# Altium PCB car_template 2021V3.PcbDoc (part 2 of 2)
Units mm, origin at the board's own origin, x right, y up, seen from the top; angles counter-clockwise.
Board outline 64 x 85 mm, 4 copper layers (Top Side, Ground Plane, Power Plane, Bottom Side), stack 0.844 mm thick; 89 components, 78 nets, 327 pads, 91 vias.
Unrouted connection lines stored in the file: 10.
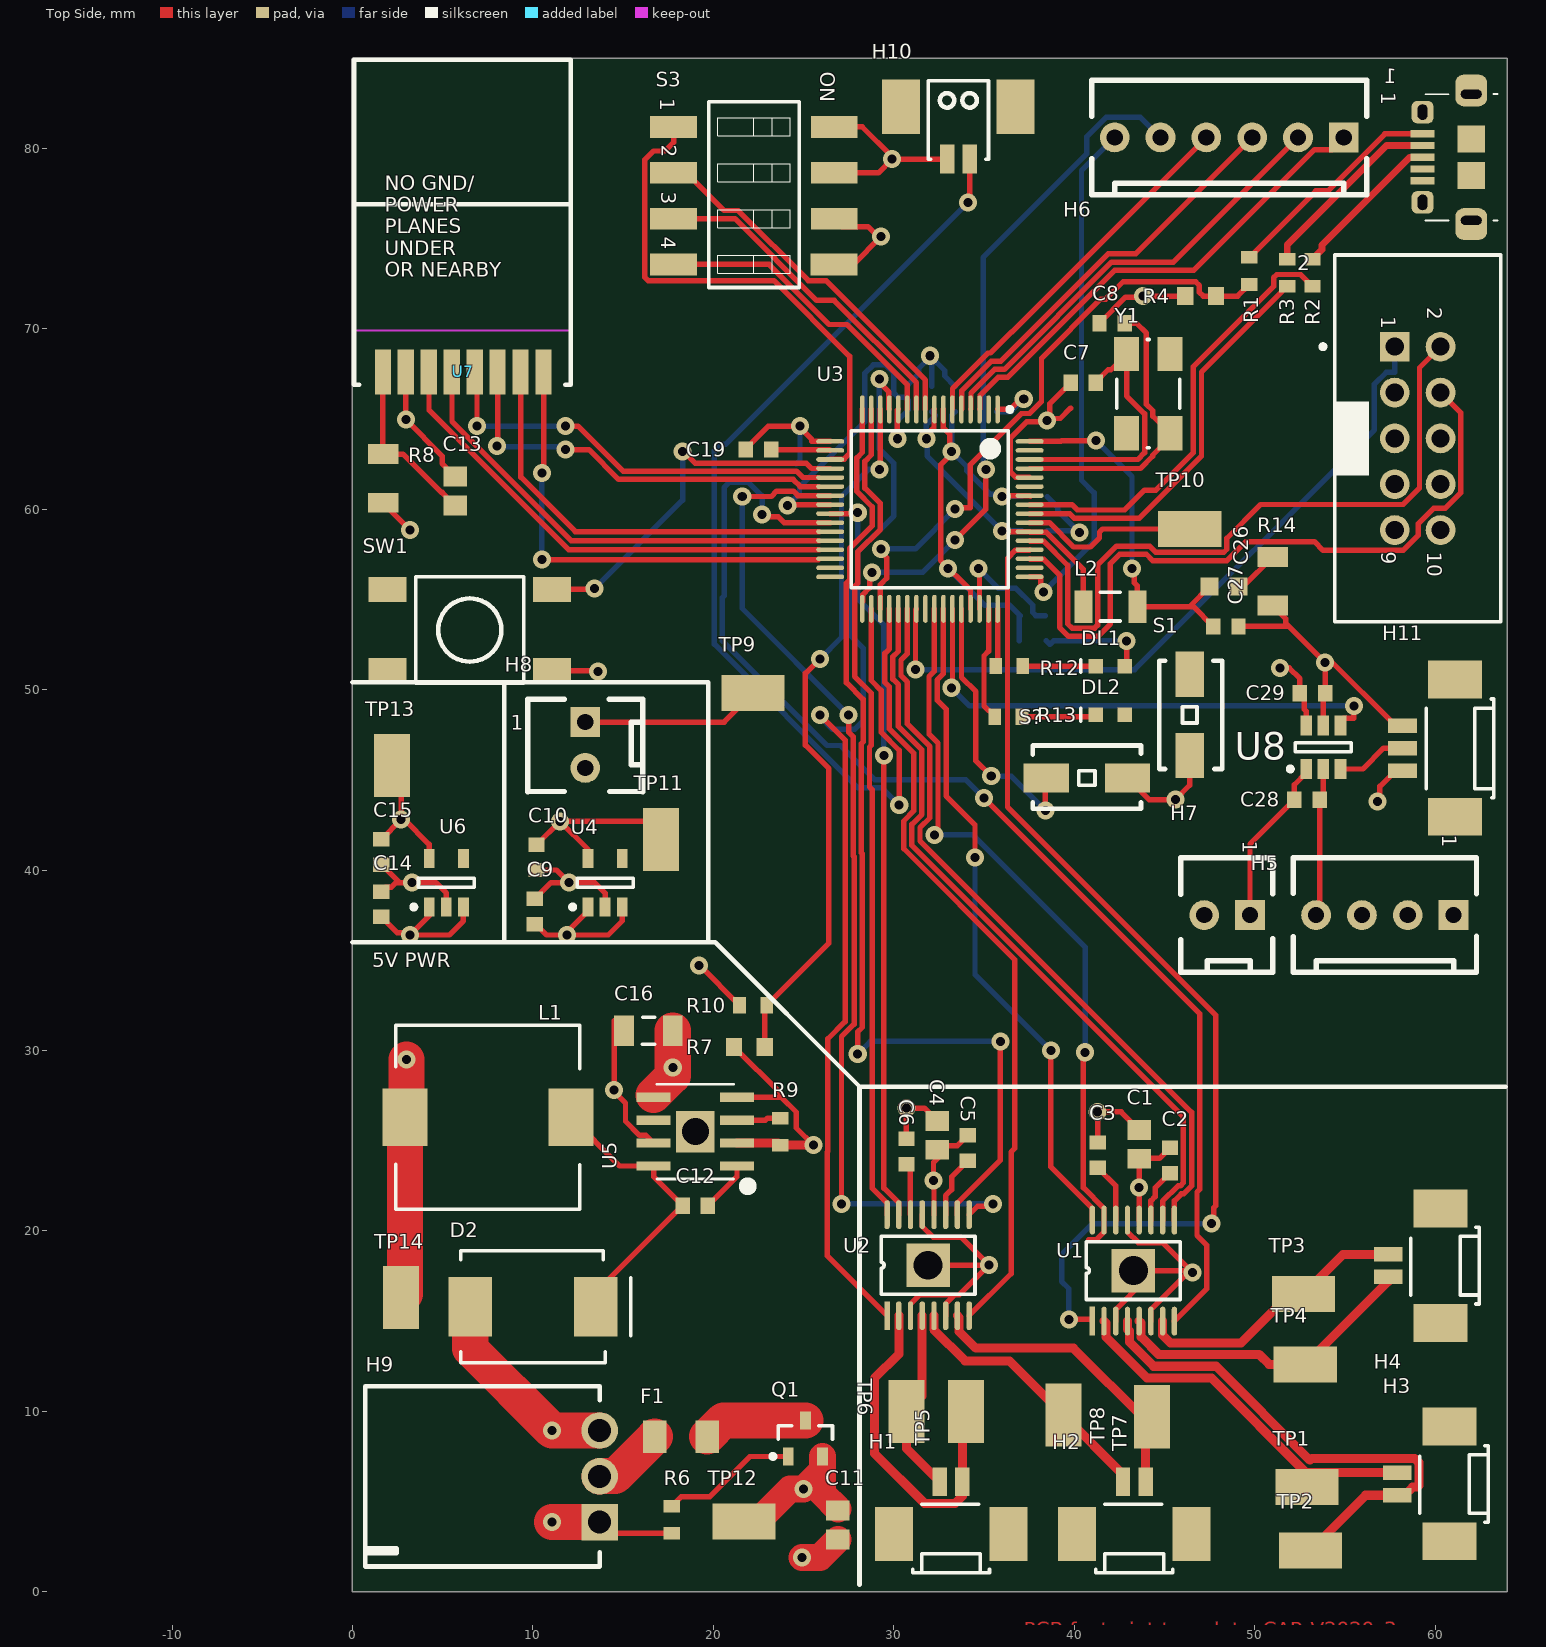
[diagram p0: Top Side view]

## Via types
v1: diameter 1, hole 0.5, Top Side to Bottom Side, 57 vias
v2: diameter 1, hole 0.5, Top Side to Bottom Side, tented both sides, 31 vias
v3: diameter 2.2, hole 1.6, Top Side to Bottom Side, 2 vias
v4: diameter 2, hole 1.5, Top Side to Bottom Side, 1 vias

## Nets (pads, with @x,y where several pads share a name; then routed paths per layer and width w, separated by ;. In a path a pad name is that pad's centre, name@x,y a point inside that pad or via, vN(x,y) a via of type N, cw(c..) or ccw(c..) an arc to the next point about the centre after c; other vN are vias at no path point) (continued)
SPI_MOSI: U3.22 U7.6 | length 22.1
  Top Side w0.3: v2@8.057,63.557 U7.6@8.057,67.2 ; v2(11.8,63.3) 13.1,63.3 14.75,61.65 24.418,61.65 24.818,61.25 U3.22@25.85,61.25
  Bottom Side w0.3: v2@8.05,63.45 v2@11.65,63.45
  other v2: 8,63.5
SPI_SPCK: U3.21 U7.5 | length 22.6
  Top Side w0.3: v2(6.9,64.6) U7.5@6.9,67.086 ; v2(11.8,64.6) 12.5,64.6 15,62.1 24.604,62.1 24.954,61.75 U3.21@25.85,61.75
  Bottom Side w0.3: v2(6.9,64.6) v2(11.8,64.6)
STATUS0: R12.2 U3.48 | length 3.2
  Top Side w0.3: R12.2 35.75,51.4 U3.48
STATUS1: R13.2 U3.47 | length 6.3
  Top Side w0.3: U3.47 35.25,52.124 35,51.874 35,49.1 R13.2
SWCLK: 2.2 U3.53 | length 39.7
  Top Side w0.3: U3.53 37.55,58.225 38.301,58.225 39.638,56.888 39.638,53.637 39.876,53.4 41.124,53.4 41.3,53.576 41.3,56.911 42.339,57.95 44.176,57.95 44.526,57.6 48.274,57.6 48.45,57.776 48.45,58.381 50.324,60.255 58.226,60.255 59.134,61.163 59.134,67.834 2.2
SWDIO: 2.4 U3.51 | length 39.7
  Top Side w0.3: U3.51 37.55,57.225 38.301,57.225 39.188,56.338 39.188,53.451 39.689,52.95 41.311,52.95 42,53.639 42,56.974 42.526,57.5 43.989,57.5 44.339,57.15 48.461,57.15 49.511,58.2 53.308,58.2 53.793,57.715 58.226,57.715 59.066,58.555 59.066,59.197 59.907,60.037 60.548,60.037 61.425,60.914 61.425,65.335 2.4
USB_DETECT: R1.1 R4.2 U3.35 | length 33.8
  Top Side w0.3: U3.35 29.25,55.819 29.6,56.169 29.6,57.311 29.3,57.611 v1(29.3,57.8) ; v1(33.4,60) 33.476,60.076 34.242,60.076 34.242,62.473 37.069,65.3 37.531,65.3 38.184,65.953 38.184,68.358 41.463,71.637 41.737,71.637 42.7,72.6 46.724,72.6 46.937,72.387 46.937,72.013 47.15,71.8 R4.2 49.05,71.8 R1.1
  Bottom Side w0.3: v1(29.3,57.8) 31.2,57.8 v1(33.4,60)
V_BATT: F1.2 H9.2 | length 4
  Top Side w2: H9.2 13.706,6.406 14.556,6.406 F1.2
V_BATT_FUSED: C1.2 C2.2 C4.2 C5.2 C11.2 Q1.2 R7.1 R9.2 TP12.1 U1.12 U2.12 U5.2 U5.4 | length 33.9
  Top Side w0.3: R7.1 23.769,27.581 23.769,27.405 ; U5.4 23.769,27.405 ; R9.2@23.585,24.865 R9.2 ; v2(25.55,24.75) 24.593,25.707 24.593,26.582 23.769,27.405 ; U2.12 32.225,22.775 v2(32.2,22.8) 32.2,23.8 C4.2@32.8,24.4 ; C4.2 32.623,24.723 33.523,24.723 C5.2 ; U1.12 v2(43.6,22.4) C1.2 43.623,24.023 44.723,24.023 C2.2
  Top Side w0.5: U5.2 R9.2@23.585,24.865 ; R9.2 v2(25.55,24.75)
  Top Side w1.5: TP12.1 22.45,3.9 24.25,5.7 v2(25,5.7) 26.05,6.75 ; Q1.2 26.05,6.75 ; C11.2@26.9,4.6 26.05,5.45 26.05,6.75
VBUS: 1.1 R1.2 | length 12.4
  Top Side w0.3: R1.2 53.388,77.638 54.054,77.638 57.215,80.8 1.1
pads on no net: 1.4 2.3 2.9 2.10 H1.M H2.M H3.M H4.M H10.M H11.M SW1.1 SW1.3 U3.31 U3.32 U3.40 U3.50 U3.59 U3.63 U4.4 U5.6 U6.4 Y1.2 Y1.4

## Polygon pours and split planes (outlines as drawn)
GND on Ground Plane (split plane): 63.49,0.694 63.306,0.51 1.473,0.51 0.51,1.473 0.51,69.6 14.541,69.6 15.8,70.859 15.8,84.49 63.49,84.49
GND on Ground Plane (split plane): 1.106,0.51 0.51,0.51 0.51,1.106
5V on Power Plane (split plane): 63.49,53.363 63.48,53.35 63.471,53.3 63.471,28.829 19.5,28.829 19.45,28.82 19.408,28.792 17.508,26.892 17.48,26.85 17.471,26.8 17.48,26.75 17.508,26.708 20.008,24.208 20.05,24.18 20.1,24.171 22.746,24.171 25.571,21.346 25.571,12.829 0.51,12.829 0.51,39.271 17.7,39.271 17.75,39.28 17.792,39.308 21.254,42.771 29.471,42.771 29.48,42.721 29.508,42.679 29.55,42.651 29.6,42.641 29.65,42.651 29.692,42.679 29.883,42.871 44,42.871 44.05,42.88 44.092,42.908 47.932,46.749 55.4,46.749 55.439,46.754 55.476,46.769 55.507,46.793 56.407,47.693 56.431,47.724 56.446,47.761 56.451,47.8 56.451,53.471 63.49,53.471
3V3 on Power Plane (split plane): 63.49,53.729 56.378,53.729 56.376,53.731 56.339,53.746 56.3,53.751 56.261,53.746 56.224,53.731 56.193,53.707 56.169,53.676 56.154,53.639 56.149,53.6 56.149,47.863 55.337,47.051 47.9,47.051 47.861,47.046 47.824,47.031 47.793,47.007 47.769,46.976 47.754,46.939 47.754,46.937 43.946,43.129 29.829,43.129 29.78,43.12 29.738,43.092 29.659,43.013 29.65,43.02 29.6,43.029 21.2,43.029 21.15,43.02 21.108,42.992 17.646,39.529 5.129,39.529 5.129,39.7 5.129,40.3 5.129,59.371 13.4,59.371 13.45,59.38 13.492,59.408 30.654,76.571 36.6,76.571 36.65,76.58 36.692,76.608 44.573,84.49 63.49,84.49
V_BATT_FUSED on Power Plane (split plane): 63.49,0.64 63.44,0.63 63.398,0.602 63.37,0.56 63.36,0.51 28.273,0.51 28.181,0.602 28.139,0.63 28.09,0.64 15.529,0.64 15.529,4.346 17.054,5.871 23.2,5.871 23.25,5.88 23.292,5.908 25.792,8.408 25.82,8.45 25.829,8.5 25.829,21.4 25.82,21.45 25.792,21.492 22.892,24.392 22.85,24.42 22.8,24.429 20.154,24.429 17.783,26.8 19.554,28.571 63.49,28.571
no net on Power Plane (split plane): 36.546,76.829 30.6,76.829 30.55,76.82 30.508,76.792 13.346,59.629 5.129,59.629 5.129,60.6 5.12,60.65 5.092,60.692 4.592,61.192 4.55,61.22 4.5,61.229 0.51,61.229 0.51,84.49 44.206,84.49
3V3_RADIO on Power Plane (split plane): 4.871,60.546 4.871,40.3 4.871,39.7 4.871,39.529 0.51,39.529 0.51,60.971 4.446,60.971
no net on Power Plane (split plane): 25.571,8.554 23.146,6.129 17,6.129 16.95,6.12 16.908,6.092 15.308,4.492 15.28,4.45 15.271,4.4 15.271,0.51 0.51,0.51 0.51,12.571 25.571,12.571

## Other copper
Top Side:
  text "PCB footprint template_CAR V2020_3" at 37.2,-2.5 h0.8
Ground Plane (plane layer: these items are gaps in the copper):
  pour cut-out: -15.2,62.4
  pour cut-out: 0.2,84.8 0.071,84.671 0.071,69.6 14.541,69.6 15.8,70.859 15.8,85.036
  lines w0.254: 0,85 64,85 64,1.021 62.979,0 ; 0.2,1.6 0.2,84.8 63.9,84.8 63.9,0 1.8,0 0.2,1.6
Power Plane (plane layer: these items are gaps in the copper):
  lines w0.254: 0,0 64,0 ; 0,12.7 25.6,12.7 ; 0,39.6 0.2,39.4 5,39.4 ; 0,61.1 4.5,61.1 5,60.6 5,40.3 5,39.4 ; 0,85 64,85 64,0 ; 5,39.7 5,39.4 ; 5,59.5 13.4,59.5 30.6,76.7 30.9,76.7 36.6,76.7 45,85.1 ; 15.4,0 15.4,4.4 17,6 23.2,6 25.7,8.5 25.7,21.4 22.8,24.3 20.1,24.3 17.6,26.8 19.5,28.7 19.683,28.7 ; 15.529,0.51 28.09,0.51 28.4,0.2 ; 23.1,28.7 19.683,28.7 ; 29.6,42.771 29.829,43 30.159,43 44,43 47.9,46.9 ; 29.6,42.9 21.2,42.9 17.7,39.4 17.4,39.4 5,39.4 ; 44.4,28.7 45.825,28.7 63.6,28.7 63.6,53.3 63.9,53.6 56.3,53.6 ; 44.5,28.7 26.5,28.7 19.683,28.7 ; 58.8,28 59.1,28 ; 63.49,0.51 64,0 ; 64,23.1 64,0 ; 48,80 48,80
  lines w0.3: 47.9,46.9 55.4,46.9 56.3,47.8 56.3,53.6

## Silkscreen, mask and mechanical layers (free items; w line width, h text height)
Top Overlay:
  lines w0.254: 0,36 20.1,36 28.1,28 28.1,2.7 28.1,0.4 ; 0,50.4 19.706,50.4 19.706,36 ; 8.4,36.1 8.4,50.3 ; 28.2,28 38,28 63.9,28
  text "5V PWR" at 1.1,34.6 h0.8
Board Outline:
  the board outline again, w0.254

## Dimensions
0,86 to 64,86 on Mechanical 1
65,85 to 65,0 on Mechanical 1

## Text inside footprints (layer, text, board x,y; h text height)
1: Mechanical 1 "PCB Edge" at 64.27,81.65 h0.8 r90
2: Top Overlay "1" at 57.01,70.7 h0.8 r270; Top Overlay "10" at 59.55,57.64 h0.8 r270; Top Overlay "9" at 57.01,57.64 h0.8 r270
H5: Top Overlay "1" at 60.385,41.945 h0.8 r270
H6: Top Overlay "1" at 57,83.1 h0.8 r270
H7: Top Overlay "1" at 49.326,41.627 h0.8 r270
H8: Top Overlay "1" at 8.773,47.786 h0.8
S3: Top Overlay "4" at 17.125,75.105 h0.8 r270; Top Overlay "3" at 17.1,77.58 h0.8 r270; Top Overlay "2" at 17.15,80.18 h0.8 r270; Top Overlay "1" at 17.05,82.78 h0.8 r270; Top Overlay "ON" at 25.928,84.228 h0.8 r270
U5: Mechanical 13 "*" at 20.93,24.344 h0.8 r180
U7: Top Overlay "NO GND/ / POWER / PLANES / UNDER / OR NEARBY" at 1.786,72.875 h0.8